# EAGLE board KickerBoard (EAGLE 6.4)
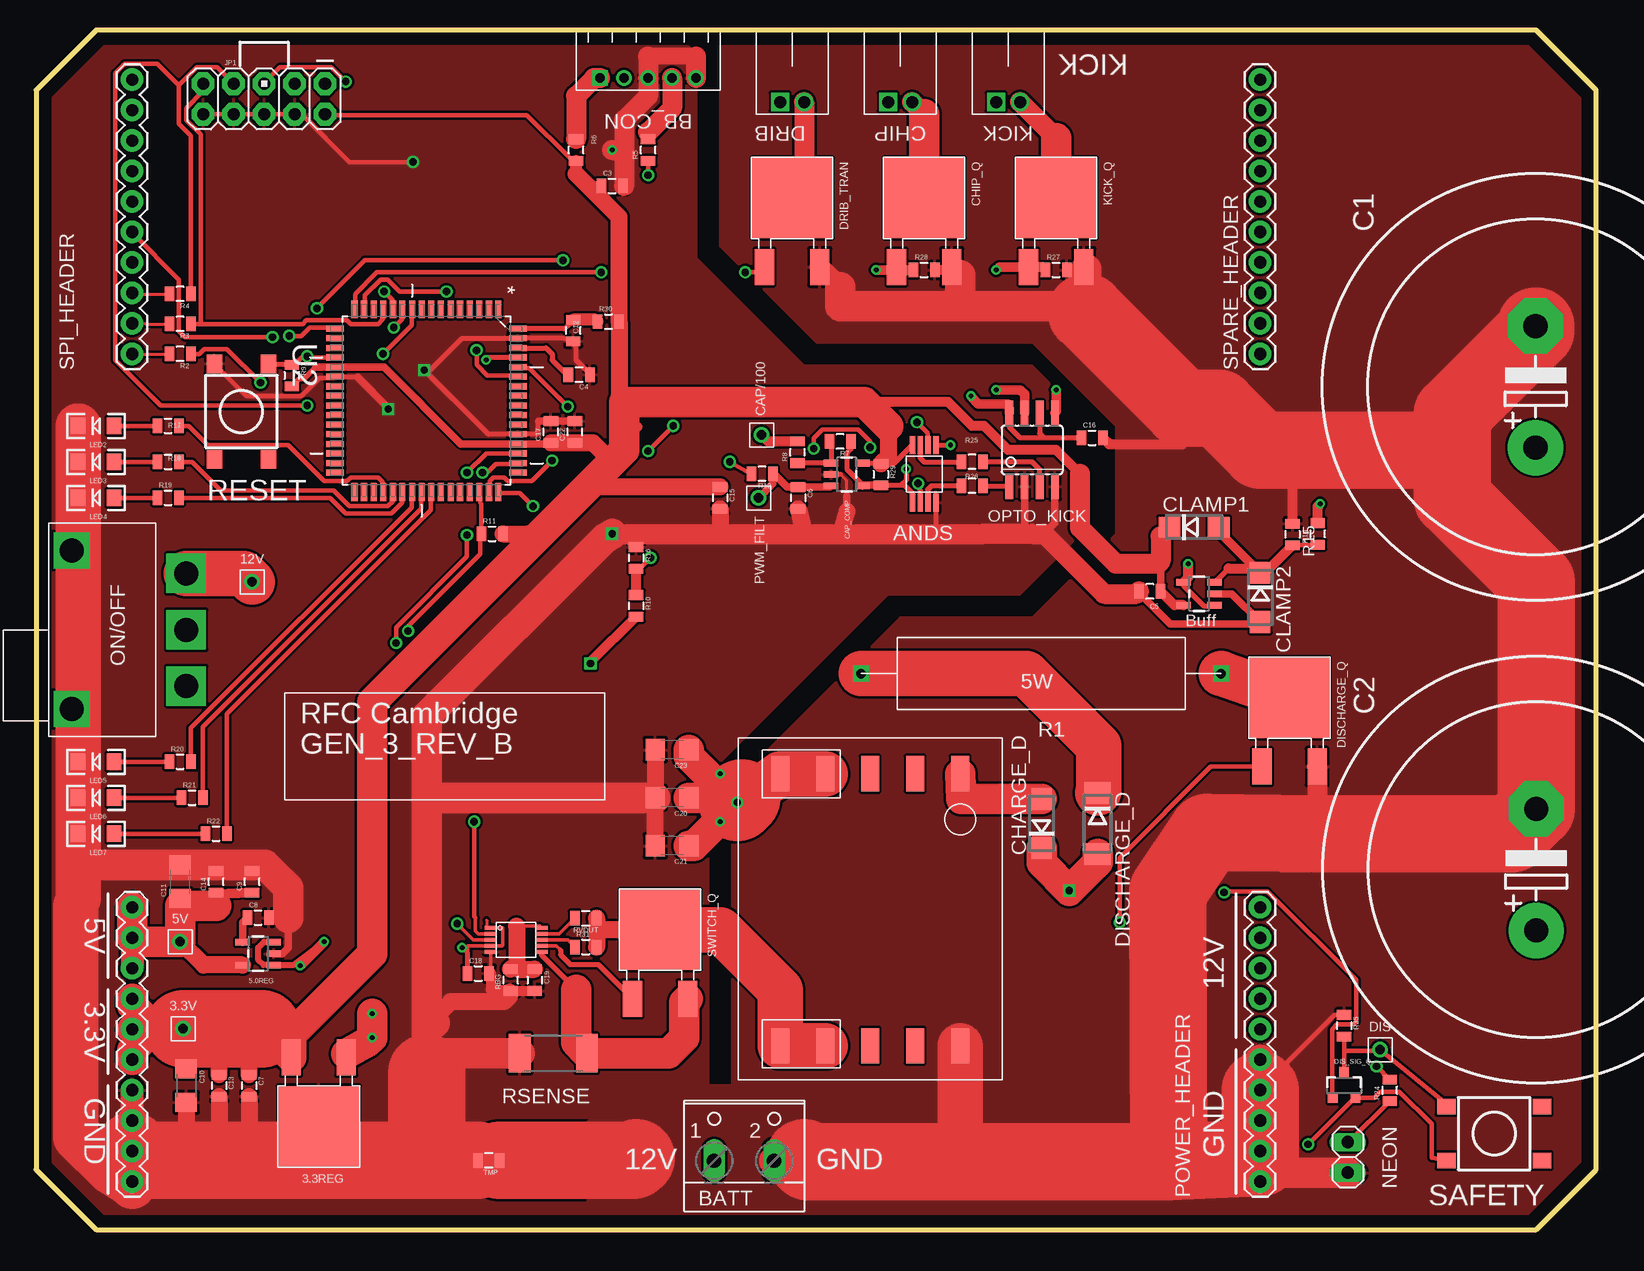
[diagram p0: board, top side]
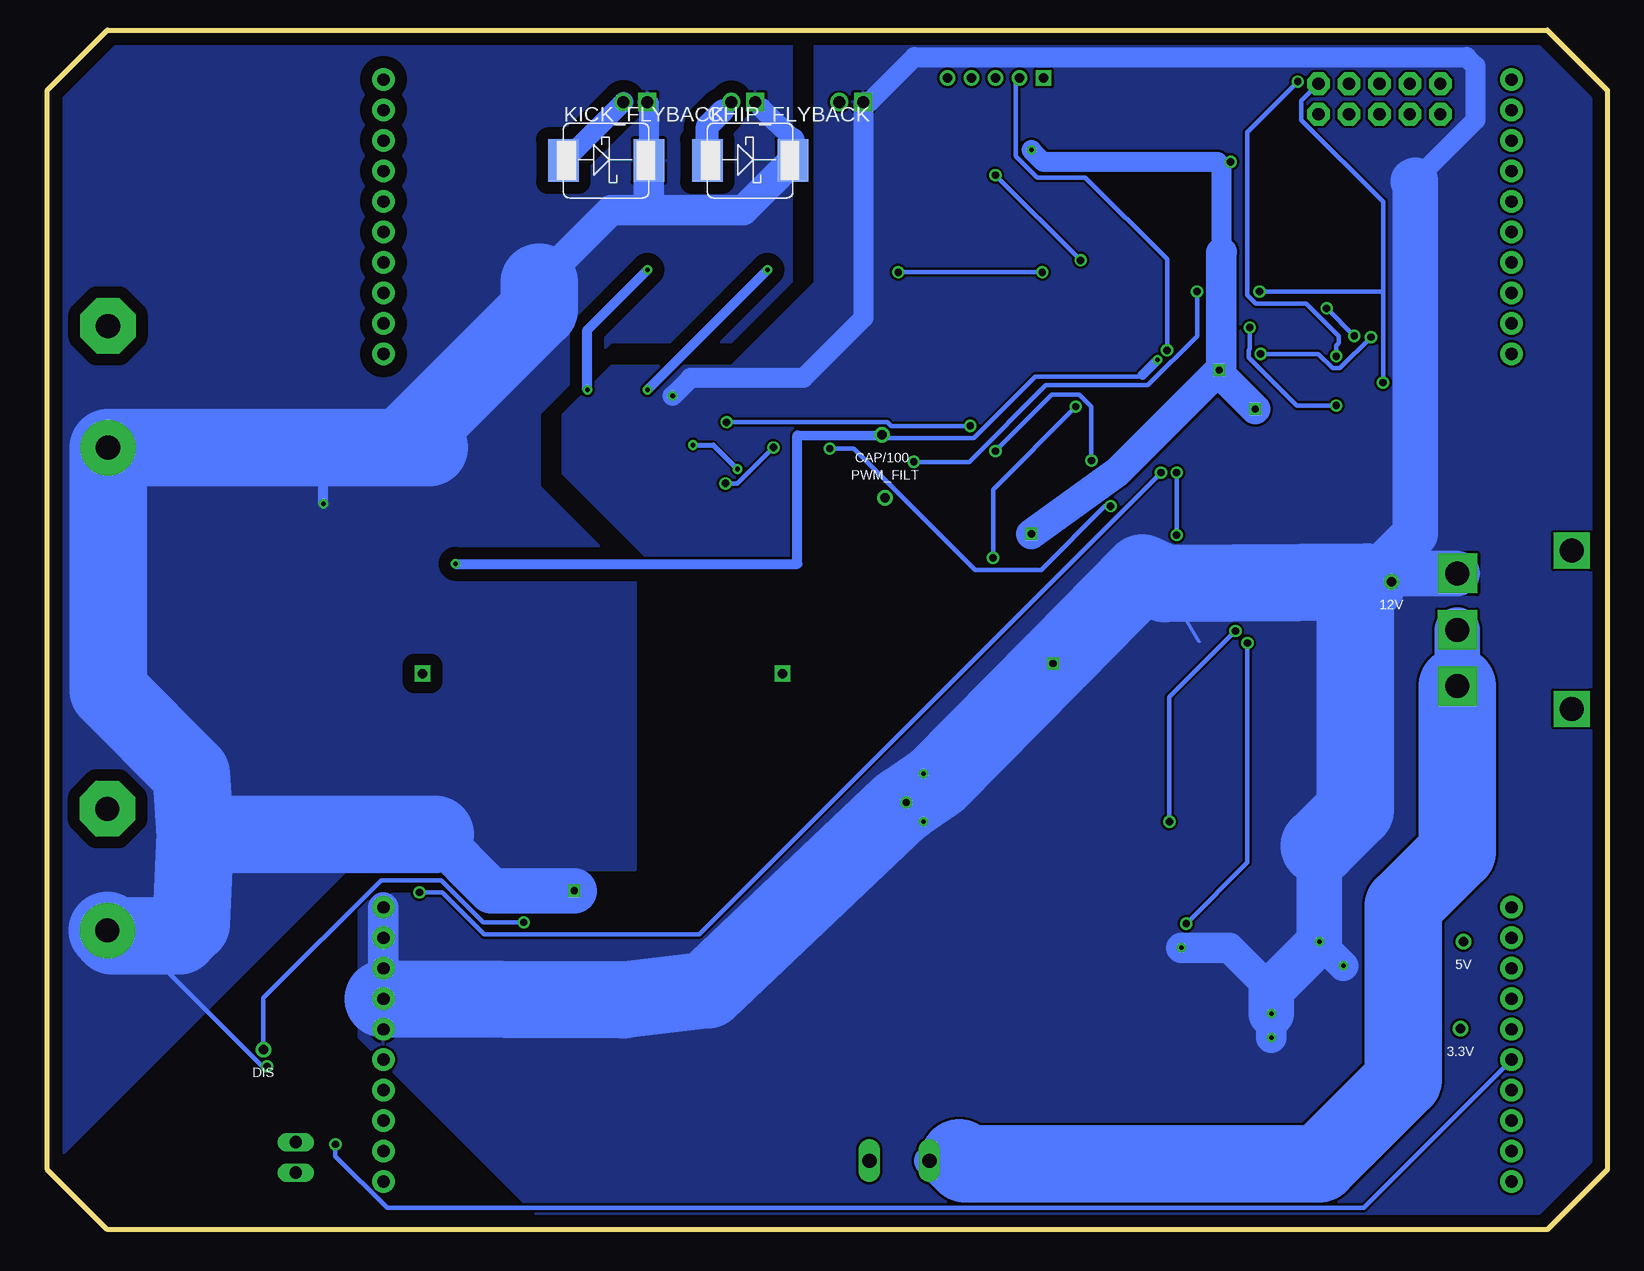
[diagram p1: board, bottom side, seen from below]

Size 130 x 100 mm. Coordinates in mm from the lower left corner, seen from the top.
Outline: 0,5 5,0 125,0 130,5 130,95 125,100 5,100 0,95 0,5
Copper layers (1*16): Top 0.035mm / dielectric 1.5mm / Bottom 0.035mm
Design rules "default *": minimum track width 15mil, minimum drill 24mil, track to track 8mil, track to pad 8mil, pad to pad 8mil, via to via 8mil, smd to smd 8mil, copper to edge 40mil, drill to drill 8mil, minimum pad ring 10mil, minimum via ring 8mil, stop-mask expansion 4mil, vias tented up to drill 0mil, thermal gap 10mil

## Footprints (pad centres in the part's own frame; a part is rotated, then mirrored left to right if it is on the bottom)
DPAK = smd 6.7 x 6.7: DRAIN 0,0 | smd 3 x 1.6: GATE 5.75,-2.3; SOURCE 5.75,2.3
TESTING_PT = drill 0.8: P$1 0,0
SOT23-5 = smd 0.55 x 1.2: 1 -0.95,-1.3; 2 0,-1.3; 3 0.95,-1.3; 4 0.95,1.3; 5 -0.95,1.3
TSSOP8 = smd 1.5 x 0.45: P$1 -2.4,0.975; P$2 -2.4,0.325; P$3 -2.4,-0.325; P$4 -2.4,-0.975; P$5 2.4,-0.975; P$6 2.4,-0.325; P$7 2.4,0.325; P$8 2.4,0.975
W237-102 = drill 1.194 long: 1 -2.5,-1.27; 2 2.5,-1.27
JST-5-2MM = drill 0.8 square: 1 4,0 | drill 0.8: 2 2,0; 3 0,0; 4 -2,0; 5 -4,0
EB35D = drill 2.007 pad 4.597: + -5.08,0 | drill 2.007 pad 4.597 octagon: - 5.08,0
0805 = smd 0.8 x 1.2: 1 -0.9,0; 2 0.9,0
1206 = smd 1.6 x 1.8: 1 -1.4,0; 2 1.4,0
DO214AC = smd 1.8 x 1.7: A 2.05,0; C -2.05,0
10-MSOP = smd 0.97 x 0.31: P$1 -0.485,-0.155; P$2 -0.485,-0.655; P$3 -0.485,-1.155; P$4 -0.485,-1.655; P$5 -0.485,-2.155; P$6 3.785,-2.155; P$7 3.785,-1.655; P$8 3.785,-1.155; P$9 3.785,-0.655; P$10 3.785,-0.155
JST-2-2MM = drill 1 square: 1 1,1 | drill 1: 2 -1,1
DO214AB = smd 2.54 x 3.556: ANODE 0,3.111; CATHODE 7.112,3.111
SOT23-3 = smd 0.8 x 0.9: 1 -0.95,-1; 2 0.95,-1; 3 0,1.1
DO214AA = smd 1.8 x 2.2: A 2.55,0; C -2.55,0
AVR_ICSP = drill 1.016 pad 1.88 octagon: 1 -1.27,5.08; 2 1.27,5.08; 3 -1.27,2.54; 4 1.27,2.54; 5 -1.27,0; 6 1.27,0; 7 -1.27,-2.54; 8 1.27,-2.54; 9 -1.27,-5.08; 10 1.27,-5.08
LED-1206 = smd 1.2 x 1.4: A -1.5,0; C 1.5,0
1X10 = drill 1.016 pad 1.88: 1 0,0; 2 2.54,0; 3 5.08,0; 4 7.62,0; 5 10.16,0; 6 12.7,0; 7 15.24,0; 8 17.78,0; 9 20.32,0; 10 22.86,0
TACTILE_SWITCH_TALL = smd 1.55 x 1.3: A1 -3.975,-2.25; A2 3.975,-2.25; B1 -3.975,2.25; B2 3.975,2.25
1X02 = drill 1.016 long: 1 -1.27,0; 2 1.27,0
CK_SWITCH = drill 2 pad 3.302 square: COM 0,0; IN1 4.699,0; IN2 -4.699,0 | drill 2 pad 2.54 square: SUP1 -6.604,-9.525; SUP2 6.604,-9.525
SOIC08 = smd 0.66 x 2.032: 1 -1.905,-3.073; 2 -0.635,-3.073; 3 0.635,-3.073; 4 1.905,-3.073; 5 1.905,3.073; 6 0.635,3.073; 7 -0.635,3.073; 8 -1.905,3.073
5WRESISTOR = drill 0.8 square: P$1 -15,0; P$2 15,0
R2512 = smd 1.8 x 3.2: 1 -2.8,0; 2 2.8,0
QFP80P1600X1600X120-64N = smd 1.473 x 0.508: 1 -7.62,5.994; 2 -7.62,5.207; 3 -7.62,4.394; 4 -7.62,3.607; 5 -7.62,2.794; 6 -7.62,2.007; 7 -7.62,1.194; 8 -7.62,0.406; 9 -7.62,-0.406; 10 -7.62,-1.194; 11 -7.62,-2.007; 12 -7.62,-2.794; 13 -7.62,-3.607; 14 -7.62,-4.394; 15 -7.62,-5.207; 16 -7.62,-5.994; 33 7.62,-5.994; 34 7.62,-5.207; 35 7.62,-4.394; 36 7.62,-3.607; 37 7.62,-2.794; 38 7.62,-2.007; 39 7.62,-1.194; 40 7.62,-0.406; 41 7.62,0.406; 42 7.62,1.194; 43 7.62,2.007; 44 7.62,2.794; 45 7.62,3.607; 46 7.62,4.394; 47 7.62,5.207; 48 7.62,5.994 | smd 0.508 x 1.473: 17 -5.994,-7.62; 18 -5.207,-7.62; 19 -4.394,-7.62; 20 -3.607,-7.62; 21 -2.794,-7.62; 22 -2.007,-7.62; 23 -1.194,-7.62; 24 -0.406,-7.62; 25 0.406,-7.62; 26 1.194,-7.62; 27 2.007,-7.62; 28 2.794,-7.62; 29 3.607,-7.62; 30 4.394,-7.62; 31 5.207,-7.62; 32 5.994,-7.62; 49 5.994,7.62; 50 5.207,7.62; 51 4.394,7.62; 52 3.607,7.62; 53 2.794,7.62; 54 2.007,7.62; 55 1.194,7.62; 56 0.406,7.62; 57 -0.406,7.62; 58 -1.194,7.62; 59 -2.007,7.62; 60 -2.794,7.62; 61 -3.607,7.62; 62 -4.394,7.62; 63 -5.207,7.62; 64 -5.994,7.62
10-TRANSFORMER = smd 2.92 x 1.52: P$1 0,0; P$2 0,-3.75; P$3 0,-7.5; P$4 0,-11.25; P$5 0,-15; P$6 22.67,-15; P$7 22.67,-11.25; P$8 22.67,-7.5; P$9 22.67,-3.75; P$10 22.67,0

## Placement (x,y rotation side)
3.3REG  3.3REG1AREG  [DPAK]  23.55,8.6 90 top
3.3V  TEST_PT  [TESTING_PT]  12.25,16.75 0 top
5.0REG  MIC5219 5V  [SOT23-5]  18.5,23 90 top
5V  TEST_PT  [TESTING_PT]  12,24 0 top
12V  TEST_PT  [TESTING_PT]  18,54 0 top
ANDS  AND-DUAL  [TSSOP8]  74,63 90 top
BATT  [W237-102]  59,7 0 top
BB_CON  JST-5  [JST-5-2MM]  51,96 180 top
C1  1500uF  [EB35D]  124.95,70.25 90 top
C2  1500uF  [EB35D]  125,30 90 top
C3  4.7uF  [0805]  48,87 0 top
C4  .1uF  [0805]  45.24,71.26 180 top
C5  .1uF  [0805]  92.8,53.2 180 top
C6  .1uF  [0805]  63.5,61 270 top
C7  .01uF  [0805]  17.75,12 270 top
C8  470pF  [0805]  18.5,26 0 top
C9  .01uF  [0805]  18,29 90 top
C10  47uF  [1206]  12.5,12 270 top
C11  47uF  [1206]  12,29 90 top
C12  .1uF  [0805]  44.76,74.95 90 top
C13  1uF  [0805]  15.25,12 270 top
C14  1uF  [0805]  15,29 90 top
C15  .1uF  [0805]  57,61 270 top
C16  .1uF  [0805]  88,66 0 top
C17  1uF  [0805]  42.9,66.5 90 top
C18  10uF  [0805]  36.85,21.35 0 top
C19  100pF  [0805]  41.55,20.8 270 top
C20  47uF  [1206]  53,36 180 top
C21  47uF  [1206]  53,32 180 top
C22  .01uF  [0805]  44.9,66.5 90 top
C23  47uF  [1206]  53,40 180 top
CAP/100  TEST_PT  [TESTING_PT]  60.45,66.25 0 top
CAP_COMP  LM331  [SOT23-5]  67.55,62.95 270 top
CAP_SENSE_BUF  MCP6291T-E/OT  [SOT23-5]  96.9,53 90 top
CHARGE_D  1kV, ultrafast  [DO214AC]  83.8,33.85 90 top
CHARGE_U  LT3750  [10-MSOP]  38.35,25.3 0 top
CHIP  JST-22MM  [JST-2-2MM]  72,95 180 top
CHIP_FLYBACK  DIODE-ZENERDO214AB  [DO214AB]  75,86 0 bottom
CHIP_Q  [DPAK]  74,86 270 top
CLAMP1  DIODE-ZENERDO214AC  [DO214AC]  96.5,58.55 0 top
CLAMP2  DIODE-ZENERDO214AC  [DO214AC]  102,52.7 270 top
DIS  TEST_PT  [TESTING_PT]  112,15 0 top
DIS_SIG_Q  MOSFET-PCHANNEL  [SOT23-3]  109,12 0 top
DISCHARGE_D  [DO214AA]  88.45,33.85 270 top
DISCHARGE_Q  [DPAK]  104.45,44.35 270 top
DRIB  JST-22MM  [JST-2-2MM]  63,95 180 top
DRIB_TRAN  [DPAK]  63,86 270 top
FRAME1  FRAME-LETTER  [CREATIVE_COMMONS]  -77.47,76.2 0 top  (outside the outline)
FRAME2  FRAME-LETTER  [CREATIVE_COMMONS]  -77.47,85.09 0 top  (outside the outline)
FRAME3  FRAME-LETTER  [CREATIVE_COMMONS]  -77.47,93.98 0 top  (outside the outline)
FRAME4  FRAME-LETTER  [CREATIVE_COMMONS]  -75.47,65.87 0 top  (outside the outline)
GEN_3_REV_B  Spring 2015  [LOGO]  22,37.1 0 top
JP1  M05X2PTH  [AVR_ICSP]  19,94.25 270 top
KICK  JST-22MM  [JST-2-2MM]  81,95 180 top
KICK_FLYBACK  DIODE-ZENERDO214AB  [DO214AB]  87,86 0 bottom
KICK_Q  [DPAK]  85,86 270 top
LED2  [LED-1206]  5,67 180 top
LED3  [LED-1206]  5,64 180 top
LED4  [LED-1206]  5,61 180 top
LED5  [LED-1206]  5,39 180 top
LED6  [LED-1206]  5,36 180 top
LED7  [LED-1206]  5,33 180 top
LOGIC_HEADER  M10SILK_FEMALE_PTH  [1X10]  8,4 90 top
MAN-DIS  SWITCH-MOMENTARY-2SMD-4  [TACTILE_SWITCH_TALL]  121.5,8 180 top
NEON  [1X02]  109.31,6.02 270 top
ON/OFF  SPDT-SWITCH  [CK_SWITCH]  12.5,50 270 top
OPTO_KICK  ILD205  [SOIC08]  83,65 0 top
POWER_HEADER  M10SILK_FEMALE_PTH  [1X10]  102,4 90 top
PWM_FILT  TEST_PT  [TESTING_PT]  60.2,61 180 top
R1  2k,5w  [5WRESISTOR]  83.75,46.35 180 top
R2  4.7k  [0805]  12,73 180 top
R3  4.7k  [0805]  12,75.5 180 top
R4  4.7k  [0805]  12,78 180 top
R5  20  [0805]  51,90 90 top
R6  100  [0805]  45,90 90 top
R7  100k  [0805]  67,65.7 180 top
R8  3k  [0805]  63.45,64.8 90 top
R9  10k  [0805]  21.3,71.2 270 top
R10  80k  [0805]  50,52 270 top
R11  100k  [0805]  38,58 0 top
R12  100k  [0805]  60.5,63 180 top
R14  1M  [0805]  106.8,58 90 top
R15  10K  [0805]  104.7,57.95 270 top
R16  20k  [0805]  50,56 270 top
R17  1k  [0805]  11,67 0 top
R18  1k  [0805]  11,64 0 top
R19  1k  [0805]  11,61 0 top
R20  1k  [0805]  12,39 0 top
R21  1k  [0805]  13,36 0 top
R22  1k  [0805]  15,33 0 top
R24  536k  [0805]  112.8,11.6 90 top
R25  100  [0805]  78,64 180 top
R26  100  [0805]  78,62 180 top
R27  1k  [0805]  85,80 0 top
R28  1k  [0805]  74,80 0 top
R29  10k  [0805]  70.4,62.95 270 top
R30  10k  [0805]  47.69,75.69 0 top
R31  43k  [0805]  45.8,23.55 0 top
R35  10k  [0805]  109,17 270 top
RBG  2.49k  [0805]  39.55,20.8 90 top
RSENSE  10m  [R2512]  43.1,14.7 0 top
RVOUT  50.4k  [0805]  45.8,25.95 0 top
S1  SWITCH-MOMENTARY-2SMD-4  [TACTILE_SWITCH_TALL]  17.1,68.2 90 top
SPARE_HEADER  M10SILK_FEMALE_PTH  [1X10]  102,73 90 top
SPI_HEADER  M10SILK_FEMALE_PTH  [1X10]  8,73 90 top
SWITCH_Q  [DPAK]  52,25 270 top
TMP  0  [0805]  37.72,5.76 180 top
U2  ATMEGA165PV-8AU  [QFP80P1600X1600X120-64N]  32.53,69.1 270 top
U$1  32052-TRANSFORMER  [10-TRANSFORMER]  77,38 270 top

## Library data of the parts
3.3REG 3.3V 5V 12V ANDS BB_CON CAP/100 CAP_COMP CHARGE_D CHIP CHIP_FLYBACK CHIP_Q CLAMP1 CLAMP2 DIS DISCHARGE_D DISCHARGE_Q DRIB DRIB_TRAN GEN_3_REV_B KICK KICK_FLYBACK KICK_Q ON/OFF PWM_FILT R1 SWITCH_Q U$1 = gen3
5.0REG = SparkFun-PowerIC; PROD_ID: VREG-10107
BATT = con-wago-500; MPN: 237-102; OC_FARNELL: unknown; OC_NEWARK: 70K9898
C1 C2 = rcl
C3-C23 = SparkFun-Capacitors
CAP_SENSE_BUF = SparkFun-AnalogIC; PROD_ID: IC-11991
CHARGE_U = kickerchips
DIS_SIG_Q = SparkFun-DiscreteSemi; PROD_ID: TRANS-08285
FRAME1-FRAME4 = SparkFun-Aesthetics
JP1 = SparkFun-Connectors
LED2-LED7 = SparkFun-LED
LOGIC_HEADER POWER_HEADER SPARE_HEADER SPI_HEADER = SparkFun-Connectors; PROD_ID: CONN-11563
MAN-DIS S1 = SparkFun-Electromechanical; PROD_ID: SWCH-11966
NEON = pinhead
OPTO_KICK = optocoupler; MF: VISHAY/TELEFUNKEN; MPN: ILD205T; OC_FARNELL: 1469512; OC_NEWARK: 20H8678
R2-R12 R16-R22 R24-R31 R35 RBG RSENSE RVOUT TMP = SparkFun-Passives
R14 R15 = SparkFun-Resistors
U2 = Atmel_By_element14_Batch_1-00; MPN: ATMEGA165PV-8AU; OC_FARNELL: 1455104; OC_NEWARK: 58M3730; PACKAGE: TQFP-64; SUPPLIER: Atmel

## Nets
3.3V: 3.3REG.SOURCE 3.3V.P$1 ANDS.P$8 C3.1 C5.1 C7.1 C10.1 C13.1 C15.1 C17.1 C22.1 CAP_COMP.5 CAP_SENSE_BUF.5 CLAMP1.C DIS_SIG_Q.2 JP1.2 LOGIC_HEADER.5 LOGIC_HEADER.6 LOGIC_HEADER.7 MAN-DIS.B2 R6.1 R9.2 R11.2 R29.1 R30.2 U2.21 U2.52
5V: 5.0REG.5 5V.P$1 C9.1 C11.1 C14.1 LOGIC_HEADER.8 LOGIC_HEADER.9 LOGIC_HEADER.10
12V: 3.3REG.GATE 5.0REG.1 5.0REG.3 12V.P$1 C16.1 C18.1 C20.1 C21.1 C23.1 CHARGE_U.P$1 CHARGE_U.P$4 DRIB.1 ON/OFF.IN2 OPTO_KICK.6 OPTO_KICK.8 POWER_HEADER.6 POWER_HEADER.7 POWER_HEADER.8 POWER_HEADER.9 POWER_HEADER.10 R10.2 U$1.P$4 U$1.P$5
12VGND: BATT.2 C1.- C2.- C16.2 CHIP_Q.SOURCE DISCHARGE_Q.SOURCE DRIB_TRAN.SOURCE KICK_Q.SOURCE NEON.2 POWER_HEADER.1 POWER_HEADER.2 POWER_HEADER.3 POWER_HEADER.4 POWER_HEADER.5 R15.1 R27.2 R28.2 R35.1 TMP.1 U$1.P$10
AND_CHIP: ANDS.P$3 R26.2
AND_KICK: ANDS.P$7 R25.2
AREF: C4.2 U2.62
AVCC: C12.2 R30.1 U2.64
BAT+: BATT.1 ON/OFF.COM ON/OFF.IN1
BATSENSE: R10.1 R16.2 U2.60
BB_IN: BB_CON.2 U2.59
BB_OUT: R5.1 U2.17
CAP+: C1.+ C2.+ CHARGE_D.C CHIP.1 CHIP_FLYBACK.CATHODE DISCHARGE_D.A KICK.1 KICK_FLYBACK.CATHODE R14.2 R24.2
CHARGE: CHARGE_U.P$3 U2.51
CHIP_ENABLE: ANDS.P$6 U2.47
COMP_OUT: ANDS.P$1 ANDS.P$5 CAP_COMP.4 R7.1 R29.2
DISCHARGE_GATE: DIS.P$1 DIS_SIG_Q.3 DISCHARGE_Q.GATE MAN-DIS.A2 R35.2
DIVCAP: CAP/100.P$1 CAP_SENSE_BUF.1 CAP_SENSE_BUF.4 R8.2 U2.61
DONE: CHARGE_U.P$2 R11.1 U2.46
DRIB: DRIB_TRAN.GATE U2.16
GATE_CHIP: CHIP_Q.GATE OPTO_KICK.7 R28.1
GATE_KICK: KICK_Q.GATE OPTO_KICK.5 R27.1
GLED2: R18.2 U2.37
GLED3: R20.2 U2.39
GLED4: R22.2 U2.41
GND: 3.3REG.DRAIN 5.0REG.2 ANDS.P$4 BB_CON.3 BB_CON.5 C3.2 C4.1 C5.2 C6.2 C7.2 C8.2 C9.2 C10.2 C11.2 C12.1 C13.2 C14.2 C15.2 C17.2 C18.2 C19.2 C20.2 C21.2 C22.2 C23.2 CAP_COMP.2 CAP_SENSE_BUF.2 CHARGE_U.P$5 CLAMP2.A JP1.4 JP1.6 JP1.8 JP1.10 LED2.C LED3.C LED4.C LED5.C LED6.C LED7.C LOGIC_HEADER.1 LOGIC_HEADER.2 LOGIC_HEADER.3 LOGIC_HEADER.4 OPTO_KICK.2 OPTO_KICK.4 R16.1 RBG.1 RSENSE.1 S1.B2 TMP.2 U2.22 U2.53 U2.63
HYSTERESIS: CAP_COMP.1 R7.2 R8.1
KICK_ENABLE: ANDS.P$2 U2.48
MISO: JP1.9 R3.1 U2.13
MOSI: JP1.1 R2.1 U2.12
N$1: C6.1 CAP_COMP.3 PWM_FILT.P$1 R12.1
N$2: LED2.A R17.1
N$3: R3.2 SPI_HEADER.2
N$4: R4.2 SPI_HEADER.3
N$5: R31.2 RVOUT.2 SWITCH_Q.DRAIN U$1.P$6 U$1.P$7
N$6: C19.1 CHARGE_U.P$10 RBG.2
N$7: CHARGE_U.P$9 RVOUT.1
N$9: CHARGE_U.P$7 SWITCH_Q.GATE
N$10: CHARGE_U.P$8 R31.1
N$12: R2.2 SPI_HEADER.1
N$13: DISCHARGE_D.C R1.P$2
N$16: 5.0REG.4 C8.1
N$17: DISCHARGE_Q.DRAIN R1.P$1
N$20: OPTO_KICK.3 R25.1
N$21: LED3.A R18.1
N$22: LED4.A R19.1
N$24: CHARGE_U.P$6 RSENSE.2 SWITCH_Q.SOURCE
N$25: LED5.A R20.1
N$26: LED6.A R21.1
N$31: LED7.A R22.1
N$32: BB_CON.4 R5.2
N$33: KICK.2 KICK_FLYBACK.ANODE KICK_Q.DRAIN
N$34: CHIP.2 CHIP_FLYBACK.ANODE CHIP_Q.DRAIN
N$36: OPTO_KICK.1 R26.1
N$40: BB_CON.1 R6.2
PWM: R12.2 U2.15
RESET: JP1.5 R9.1 S1.A2 U2.20
RLED1: R17.2 U2.36
RLED2: R19.2 U2.38
RLED3: R21.2 U2.40
SCK: JP1.7 R4.1 U2.11
SS_E1: SPI_HEADER.6
SS_E2: SPI_HEADER.7
SS_E3: SPI_HEADER.8
SS_K: SPI_HEADER.5 U2.10
SS_M: SPI_HEADER.4
TO_DRIB: DRIB.2 DRIB_TRAN.DRAIN
TO_NEON: NEON.1 R24.1
TRANS_OUT: CHARGE_D.A U$1.P$1
UNBUF_DIVCAP: CAP_SENSE_BUF.3 CLAMP1.A CLAMP2.C R14.1 R15.2
~DIS: DIS_SIG_Q.1 U2.50

## Tracks (layer width: path | path; a pad name or v marks a point on that pad's centre or on a via)
3.3V  (via drill 0.61)
  Top 0.254: 68.75,63.95 CAP_COMP.5
  Top 0.381: MAN-DIS.B2 117.5,5.8 116.3,6 116.3,8.8 113.6,11.5 112,11.5 111.5,11 DIS_SIG_Q.2 109.8,10.9 v106,7.1 | JP1.2 24.1,92.9 40.9,92.9 44.5,89.3 R6.1
  Top 0.4: ANDS.P$8 71.47,63.85 R29.1 68.9,63.85 CAP_COMP.5
  Top 0.406: 23.29,71.89 22.3,70.9 21.9,70.9 R9.2
  Top 0.61: 23.29,71.89 U2.21 29.01,71.89 35.4,65.5 U2.52 42.79,65.49 C17.1 | C5.1 93.7,57.8 CLAMP1.C
  Top 0.8: C3.1 46,87
  Top 0.813: CAP_SENSE_BUF.5 94.85,52.05 C5.1 | 50.1,66.9 50,67 49,67 | 87,63 85,65 81,65 79,67 78,67 76,69 69,69 | 71.4,67.7 70.95,67.25 70.75,67.25
  Top 1.016: 45,88 R6.1
  Top 1.422: C17.1 C22.1 46.4,65.6 48,64 | C13.1 15.25,16.75 | C7.1 17.75,16.75 | C10.1 12.5,16.5 3.3V.P$1 | 71,67 71,64.45 R29.1 | 45,88 46,87 48.59,84.41 R30.2 48.59,69.41 49,69 | R11.2 41,58 41.5,57.5 | C15.1 47.1,61.9 46.5,62.5
  Top 1.676: 93.7,57.8 93.7,55.7 93.5,55.5 90,55.5 87,58.5 87,63
  Top 2.54: LOGIC_HEADER.6 9.75,16.7 | 9.75,16.7 10,16.7 | 10,16.7 12.2,16.7 3.3V.P$1 | 18.85,16.75 3.3REG.SOURCE 21.25,16.25 28,23 28,44 41.5,57.5 46.5,62.5 48,64 49,65 49,67 49,69 69,69 70.75,67.25 71,67 | LOGIC_HEADER.7 8,18.7 10,16.7 | LOGIC_HEADER.5 8,14.95 9.75,16.7
  Top 6.452: 3.3V.P$1 15.25,16.75 17.75,16.75 18.85,16.75
  Bottom 0.381: v106,7.1 106,6.1 101.7,1.8 20.3,1.8 8,14.1 LOGIC_HEADER.5
5V
  Top 0.254: 8.1,21.8 LOGIC_HEADER.8
  Top 0.381: C11.1 12,27
  Top 0.813: 15,27 14.9,28 | 14.9,28 C9.1 | 15,27 14,27.1 14.9,28 | 14.9,28 C14.1 | 14.05,26.95 15,27
  Top 1.422: 5.0REG.5 13.95,22.05 5V.P$1
  Top 1.93: LOGIC_HEADER.9 LOGIC_HEADER.8
  Top 2.54: LOGIC_HEADER.10 LOGIC_HEADER.9 8.32,24 5V.P$1 12,27 15,27
12V  (via drill 0.4, 0.6)
  Top 0.254: 37.55,25.8 37.55,25.2
  Top 0.305: 37.55,25.2 37.6,25.14 CHARGE_U.P$1 38.9,25.14 38.9,25.15 38.9,23.7 38.85,23.65 CHARGE_U.P$4 35.95,23.65 C18.1
  Top 0.381: v57,38 58.82,36
  Top 0.406: C16.1 84,66 | 84,66 82,66 81.09,66.91 OPTO_KICK.8 | OPTO_KICK.6 83.64,66.36 84,66 | C18.1 35.95,23.05 v35.5,23.5
  Top 0.5: 5.0REG.3 19.75,24 19,24 18.5,23.5 18.5,22.5 18.95,22.05 5.0REG.1 21.45,22.05 v24,24
  Top 0.8: OPTO_KICK.8 81.09,68.41 81,68.8 78.5,68.8 v77.9,69.5
  Top 0.813: v24,24 v22,22 | R10.2 46.2,47.3 v46.2,47.19
  Top 1.422: 25.85,14.65 3.3REG.GATE
  Top 2.54: C23.1 54.4,39.48 57.95,35.93 58,35.93 | 58,35.93 58.93,35.93 59,36 | C20.1 57.93,36 57.97,35.97 | 57.97,35.97 58,35.93 | C21.1 54.82,32 v58.42,35.6 | v57,34 57,35 57.97,35.97 | v28,18 v28,16 27.65,15.65 25.85,14.65
  Top 3.81: 12V.P$1 17.3,54.7 ON/OFF.IN2 | U$1.P$4 U$1.P$5 59,36 58.82,36
  Top 6.452: 58.82,36 v58.42,35.6
  Bottom 0.254: 34,49 36.91,53.87 | 82,17.8 81.99,19.15
  Bottom 0.61: 55.81,37.43 55.56,37.43 54.99,38
  Bottom 0.813: v46.2,47.19 45.7,47.69 45.7,47.7
  Bottom 1.676: 16,87.5 11,92.5 11,97 11.75,97.75 57.75,97.75 61.5,94 DRIB.1 62,76 67,71 76.4,71 v77.9,69.5
  Bottom 1.93: POWER_HEADER.7 POWER_HEADER.6
  Bottom 2.54: POWER_HEADER.10 POWER_HEADER.9 POWER_HEADER.8 POWER_HEADER.7 | v22,22 v24,24 | v28,16 v28,18 | v35.5,23.5 31.5,23.5 28,20
  Bottom 3.81: ON/OFF.IN2 19.3,54.7 | 21,53.7 19.3,54.7 | 19.3,54.7 20,54 | 16.2,87.4 16,87.5 16,58 19.3,54.7 | v58.42,35.6 57.73,35.6 56.14,37.2 | 24,32 v24,24 28,20 v28,18
  Bottom 6.45: 24,32 21,35 21,53.7
  Bottom 6.452: 20,54 36.91,53.87 38.77,54.74 45.7,47.7 v46.2,47.19 55.81,37.43 56.14,37.2 v58.42,35.6 59,35.2 75,20 81.99,19.15 POWER_HEADER.7
  pour Bottom: 6,99 1,94 1,6 6,1 89,1 104,16 104,28 78,28 78,54 87,63 87,68 83,72 73,72 66,79 66,99
12VGND
  Top 0.254: 125.8,78.1 125.38,76.73 C1.-
  Top 0.381: R35.1 108.2,17.9 104.2,13.9 POWER_HEADER.4
  Top 0.406: 125.9,77.25 125.38,76.73
  Top 0.813: 98.53,68.47 95.53,65.47 89.42,65.47 C16.2 | CHIP_Q.SOURCE 76.05,80 R28.2 | 86,80 R27.2 87.05,80 KICK_Q.SOURCE | R15.1 104.7,64.8 104.5,65
  Top 1.676: DISCHARGE_Q.SOURCE 106.75,33.05 106.7,33 | KICK_Q.SOURCE 87.5,80.05 | CHIP_Q.SOURCE 77,79.55 | DRIB_TRAN.SOURCE 67,78.55
  Top 2.54: POWER_HEADER.2 POWER_HEADER.1 102,4.75 NEON.2 | POWER_HEADER.4 POWER_HEADER.5 | 87.5,80.05 87.5,77 | 87.5,77 87.5,76.5 | 77,79.55 77,77 | 67,78.55 67,77 77,77 | 77,77 87.5,77 | 64,6 61.77,6 BATT.2
  Top 3.81: U$1.P$10 77,5.65
  Top 6.452: C1.- 124.95,74.95 118,68 118,65 | 118,65 118,61 125,54 C2.- 122.92,33 106.7,33 97.6,33.1 94.3,28.2 | 118,65 104.5,65 102,65 98.53,68.47 95.53,68.47 87.5,76.5 | 94.4,5.65 102,6 POWER_HEADER.2 POWER_HEADER.3 POWER_HEADER.4 | 94.3,28.2 94.4,5.65 | 94.3,28.2 94.5,28.25 | 94.4,5.65 77,5.65 64.35,5.65 64,6 | TMP.1 49.76,5.76 50,6
  pour Top: 49,12 46,9 46,2 47,1 68,1 69,2 69,9 66,12
  pour Top: 57,99 57,82 65,74 83,74 90,67 90,58 83,51 72,51 58,37 58,1 124,1 129,6 129,94 124,99
AND_CHIP
  Top 0.4: R26.2 74.6,62 74.3,61.7 74.3,60.62 ANDS.P$3
AND_KICK
  Top 0.4: ANDS.P$7 73.67,64.33 74,64 R25.2
AREF
  Top 0.254: 44,71.5 C4.2 | 40.5,73.5 U2.62
  Top 0.406: 44,71.5 43,72.5 43,73 42.5,73.5 40.5,73.5
AVCC
  Top 0.254: 40.5,75.1 U2.64 | 44.5,75.5 C12.2
  Top 0.406: 40.5,75.1 44,75.1 44.5,75.5
  Top 1.016: R30.1 46.63,75.85 C12.2
BAT+
  Bottom 2.54: 54,6 56.23,6 BATT.1
  Bottom 3.81: ON/OFF.COM ON/OFF.IN1
  Bottom 6.452: ON/OFF.IN1 12.5,31.5 17,27 17,12.5 24,5.5 53.5,5.5 54,6
BATSENSE  (via drill 0.61)
  Top 0.381: v44.3,68.6 41.1,71.8 40.2,71.8 U2.60 | v51.2,56 50.4,55.2 R16.2
  Top 0.813: R10.1 R16.2
  Bottom 0.381: v51.2,56 51.2,61.7 v44.3,68.6
BB_IN  (via drill 0.61)
  Top 0.381: v36.7,73.3 36.7,72.1 37.6,71.2 40.1,71.2 U2.59
  Bottom 0.381: v36.7,73.3 36.7,80.9 43.5,87.7 47.5,87.7 49.3,89.5 49.3,95.7 BB_CON.2
BB_OUT  (via drill 0.61)
  Top 0.381: v51,87.9 R5.1 | v43.9,80.8 27.4,80.8 v23.4,76.8 | v21.1,74.5 22.1,74.5 22.8,75.2 24.8,75.2 U2.17
  Bottom 0.381: v43.9,80.8 v51,87.9 | v21.1,74.5 v23.4,76.8
CAP+  (via drill 0.4, 0.6, 0.61)
  Top 0.381: v111.7,13.6 R24.2
  Top 0.813: 106.85,58.9 R14.2 106.8,60.3 v107,60.5
  Top 2.54: DISCHARGE_D.A 88.45,30.6 v86.1,28.25 83.8,30.55 CHARGE_D.C
  Bottom 0.381: v111.7,13.6 112.1,13.6 119.8,21.3 119.8,24.5
  Bottom 0.406: 120.7,65.57 120.3,65.17
  Bottom 0.813: 96.75,63.3 97.5,63.3 97.5,64.47 98.2,65.17 | v107,60.5 107,65.17
  Bottom 1.016: CHIP.1 70.5,93.5
  Bottom 1.676: KICK.1 79.89,93.89 KICK_FLYBACK.CATHODE | 70.5,93.5 67.89,90.89
  Bottom 1.93: 67.89,90.89 CHIP_FLYBACK.CATHODE
  Bottom 2.54: KICK_FLYBACK.CATHODE 79.89,85.11 80,85 | 80,85 72,85 CHIP_FLYBACK.CATHODE | 80,85 83,85 89,79
  Bottom 3.81: v86.1,28.25 93,28.25 97.7,32.95
  Bottom 6.452: 100.5,65.17 107,65.17 120.3,65.17 C1.+ 124.95,44.95 118,38 117.7,32.95 | 100.5,65.17 98.2,65.17 | 117.7,32.95 118,25.5 119,24.5 119.8,24.5 124.58,24.5 C2.+ | 97.7,32.95 117.7,32.95 | 89,79 89,76.67 100.5,65.17
  pour Bottom (isolate 1): 68,99 68,79 73,74 83,74 89,68 89,62 81,54 81,30 105,30 129,6 129,94 124,99
CHARGE  (via drill 0.61)
  Top 0.305: CHARGE_U.P$3 36.44,24.15 35.4,25.19 35.4,25.2
  Top 0.381: v35.9,63.1 37.5,64.7 40.1,64.7 U2.51 | v35.9,57.9 35.9,56.1 30,50.2 v30,48.9 | 35.4,25.2 v35.1,25.5
  Bottom 0.381: v35.9,57.9 v35.9,63.1 | v30,48.9 30,30.6 v35.1,25.5
CHIP_ENABLE  (via drill 0.61)
  Top 0.381: v43,64.1 41.3,62.4 39.3,62.4 39,62.7 38.1,62.7 37.8,62.4 37.8,61.5 U2.47 | v53.1,67 v51,64.9 | v73.4,67.3 74.3,66.4 74.3,65.4 ANDS.P$6
  Bottom 0.381: v43,64.1 43,68.6 44,69.6 46.3,69.6 v51,64.9 | v53.1,67 59.7,67 60,67.3 v73.4,67.3
COMP_OUT  (via drill 0.4)
  Top 0.4: R29.2 72.1,62.05 | 72.1,62.05 72.35,62.05 73,61.4 73,60.62 ANDS.P$1 | ANDS.P$5 v76.2,65.4 | v72.5,63.4 72.5,62.45 72.1,62.05
  Top 0.406: 68.9,62.05 67.6,63.35 67.6,64.75 67.9,65.05 R7.1
  Top 0.61: CAP_COMP.4 68.9,62.05 R29.2
  Bottom 0.4: v76.2,65.4 74.5,65.4 v72.5,63.4
DISCHARGE_GATE  (via drill 0.61)
  Top 0.381: R35.2 109,14.9 | 109,14.9 DIS_SIG_Q.3 | MAN-DIS.A2 117.5,10.3 117.5,10.5 DIS.P$1 111.9,14.9 109,14.9 | DISCHARGE_Q.GATE 97.9,38.6 90.3,31 v90.3,25.6
  Bottom 0.381: v90.3,25.6 93.7,25.6 97.2,29.1 102.2,29.1 112,19.3 DIS.P$1
DIVCAP  (via drill 0.4)
  Top 0.406: CAP_SENSE_BUF.4 95.6,53.7 97.3,52 98.15,52 CAP_SENSE_BUF.1 | U2.61 37.71,72.71 v37.5,72.5
  Top 0.813: CAP_SENSE_BUF.4 96,54.35 v96,55.5 | R8.2 61,65.7 CAP/100.P$1
  Bottom 0.381: 38.75,71.25 39.1,71.1 47.7,71.1 52.8,66 60.2,66 CAP/100.P$1
  Bottom 0.813: v96,55.5 67.5,55.5 67.5,66.2 CAP/100.P$1 | 38.75,71.25 v37.5,72.5
DONE  (via drill 0.61)
  Top 0.305: 36.95,24.64 CHARGE_U.P$2 36.86,24.65 36.6,24.91 36.6,26
  Top 0.381: U2.46 37,61.4 37,60.6 37.1,60.5 R11.1 37,57.9 37,56.3 31,50.3 v31,49.9 | v36.5,34 36.5,26.1 36.6,26
  Bottom 0.381: v36.5,34 36.5,44.4 v31,49.9
DRIB  (via drill 0.61)
  Top 0.381: v47.1,79.8 28.4,79.8 26.6,78 26.6,76.8 U2.16 | v59.1,79.8 60.3,79.8 60.7,80.2 DRIB_TRAN.GATE
  Bottom 0.381: v59.1,79.8 v47.1,79.8
GATE_CHIP  (via drill 0.4)
  Top 0.8: OPTO_KICK.7 82.36,69.64 82,70 v80,70 | v70,80 71.45,80 CHIP_Q.GATE
  Top 0.813: CHIP_Q.GATE 71.95,80 R28.1
  Bottom 0.813: v80,70 v70,80
GATE_KICK  (via drill 0.4)
  Top 0.8: KICK_Q.GATE 80.25,80.25 v80,80 | v85,70 85,68.17 OPTO_KICK.5
  Top 0.813: R27.1 83.85,80.25 KICK_Q.GATE
  Bottom 0.813: v85,70 85,75 v80,80
GLED2
  Top 0.381: R18.2 13,64 15.4,61.6 24.8,61.6 26.1,60.3 29.3,60.3 29.7,60.7 29.7,61.4 U2.37
GLED3
  Top 0.381: R20.2 12.9,41.8 31.3,60.2 31.3,61.4 U2.39
GLED4
  Top 0.381: R22.2 15.9,43 32.9,60 32.9,61.4 U2.41
GND  (via drill 0.4, 0.6, 0.61)
  Top 0.254: 63.5,60 C6.2 | 67.05,62.95 67.55,62.45 67.55,61.15 | 45,74 C12.1 44.5,74 | 46,71.5 C4.1 | 40.5,74.3 U2.63 | 82.4,61.9 OPTO_KICK.2
  Top 0.305: C18.2 37.87,21.46 CHARGE_U.P$5 | C6.2
  Top 0.381: JP1.10 14,93 16.4,93 JP1.8 16.6,93 19,93 JP1.6 19.1,93 21.5,93 JP1.4 21.7,92.9 22.2,92.9 26.1,89 v31.4,89 | C3.2 49,87 | U2.22 24.8,71 23.6,71 22.1,69.5 17.5,69.5 14.9,72.1 S1.B2 | 8.3,4.4 LOGIC_HEADER.1 7,4.3
  Top 0.4: ANDS.P$4 74.97,58.48 75,58
  Top 0.406: 67.05,62.95 CAP_COMP.2 | 45,74 45,72.5 46,71.5 | 40.5,74.3 44,74.3 44.5,74 | 26.8,71.05 24.97,71.05 U2.22 | U2.63 35.51,74.31 32.6,71.4 v32.35,71.65 37.69,66.31 U2.53 41.71,66.31 41.8,66.4 41.8,67.3 41.9,67.4
  Top 0.61: 67.55,61.15 67.56,59.86 | v29.35,68.4 29.35,68.5 26.8,71.05 | C22.2 C17.2 41.9,67.4 | CAP_SENSE_BUF.2 99.65,53 CLAMP2.A 101.85,50.5 94.5,50.5 91.9,53.1 C5.2 | 82.4,61.9 82.4,58.11 82.3,58 | OPTO_KICK.4 84.91,58.91 84,58 | 16.95,30.4 17,30 | 17,30 15.1,30 C14.2 | C9.2 17.1,29.9 17,30 | 5.0REG.2 20.5,23 21,23.5 21,25.5
  Top 0.813: RBG.1 C19.2 | 37.87,21.46 37.87,20.02 37.85,20 39.45,20 RBG.1 | 39.45,19.8 RBG.1 | C8.2 21,26 | R16.1 48.6,58.3 v48,58
  Top 1.422: 67.56,59.86 67,58 | C6.2 64,58 | C15.2 57,58 | 39.45,19.8 39.45,19.45 39,19 34.55,19 32.55,17 | C10.2 12.5,6.01 12.75,5.76 | C13.2 15.25,6.01 15.5,5.76 | C7.2 17.75,5.76 | 3.3REG.DRAIN 23.55,7.8 23,7.25 23,6.51 23.75,5.76 | C23.2 51.6,36.6 51,36 51.6,35.4 C21.2 | 55,97.8 51,97.8
  Top 1.67: BB_CON.3 51,94.5 49,92.5 49,90.5 | 49,90.5 49,87 | v48,90 48.5,90 49,90.5
  Top 1.676: v48,58 57,58 64,58 67,58 75,58 79,58 | 79,58 78.9,58.02 | 78.9,58.02 82.3,58 83,58 84,58 89,53 91.7,53 C5.2 | 79,58 78.83,57.94 78.9,58.02 | 21,25.5 21,26 | 17.16,30.4 16.95,30.4 | BB_CON.5 55,97.8 | 51,97.8 BB_CON.3
  Top 1.778: 8,4.2 8.3,4.4 8.6,4.6
  Top 1.93: LOGIC_HEADER.3 LOGIC_HEADER.4
  Top 2.54: LED5.C LED6.C LED7.C 3.5,30 3.9,30.4 C11.2 16.95,30.4 | 3.5,27.6 3.5,27.2 3.3,27 | 32.55,36 32.55,42.8 47.4,57.6 v48,58 | 32.55,36 32.55,17.92 | 33.22,17.24 32.55,17.92 | 32.55,17.92 32.55,17 32.55,15 | 32.55,15 32.55,13.05 | RSENSE.1 32.85,14.7 32.55,15 | C20.2 51,36 32.55,36 | LOGIC_HEADER.2 LOGIC_HEADER.3 8,6.5 8.75,5.75 8.75,4.75 LOGIC_HEADER.1 | 21,26 21,28.5 19.1,30.4 17.16,30.4
  Top 3.81: 3.3,27 3.3,7.7 6.2,4.8 7,4.3 7.8,3.8 8,3.6 | 3.5,27.6 3.5,30 LED4.C LED3.C LED2.C
  Top 6.452: TMP.2 32.5,5.76 | 32.5,5.76 23.75,5.76 17.75,5.76 15.5,5.76 12.75,5.76 8.78,5.76 LOGIC_HEADER.2 | 32.55,13.05 32.55,5.81 32.5,5.76
  Bottom 0.381: v31.4,89 32.15,88.65
  Bottom 1.67: 32.15,81.5 32.15,88.65 32.5,89 47,89 v48,90
  Bottom 2.54: v48,58 40.85,63.15 v32.35,71.65 32.2,71.8 | 32.2,71.8 32.2,81.45 32.15,81.5 | 32.2,71.8 32.2,71.25 v29.35,68.4
  pour Top: 6,99 1,94 1,6 6,1 56,1 56,38 71,53 82,53 88,59 88,67 83,72 64,72 55,81 55,98 54,99
HYSTERESIS
  Top 0.406: R8.1 CAP_COMP.1 66.25,65.55 R7.2
KICK_ENABLE  (via drill 0.61)
  Top 0.381: v41.4,60.3 40.3,61.4 38.6,61.4 U2.48 | v64.8,65.1 64.8,66 65.5,66.7 68.5,66.7 69.5,65.7 v69.5,65.2 | v73.5,62.2 73.5,61.8 73.7,61.6 73.7,60.6 ANDS.P$2
  Bottom 0.381: v41.4,60.3 41.9,60.3 47.2,55 52.7,55 62.8,65.1 v64.8,65.1 | v69.5,65.2 72.5,62.2 v73.5,62.2
MISO
  Top 0.381: 13.7,75.5 22.2,75.5 22.5,75.8 25.9,75.8 26.2,75.5 28.5,75.5 28.9,75.9 28.9,76.7 U2.13 | 13.7,75.5 R3.1 | 13.7,75.5 13.7,91.3 12.5,92.5 12.5,93.5 13.9,94.9 13.9,95.5 JP1.9
MOSI  (via drill 0.61)
  Top 0.381: R2.1 13.6,73 14,73.4 15.9,73.4 v18.7,70.6 | v29,78.2 29.7,77.5 29.7,76.8 U2.12
  Bottom 0.381: 18.7,78.2 18.7,85.7 25.5,92.5 25.5,94.1 JP1.1 | 18.7,78.2 v18.7,70.6 | 18.7,78.2 v29,78.2
N$1
  Top 0.254: 61.5,63 R12.1 | CAP_COMP.3 66.3,62 66.15,61.9
  Top 0.61: 61.5,63 62.6,61.9 C6.1 66.15,61.9 | PWM_FILT.P$1 61.4,62.2 R12.1
N$2
  Top 0.381: LED2.A R17.1
N$3
  Top 0.254: R3.2 9.1,75.5 SPI_HEADER.2
N$4
  Top 0.254: R4.2 8,78 SPI_HEADER.3
N$5
  Top 1.422: SWITCH_Q.DRAIN 46.75,25 R31.2 RVOUT.2
  Top 3.81: SWITCH_Q.DRAIN 57,25 62,20 62,16 | 62,16 U$1.P$6 | U$1.P$7 62.67,15.33 62,16
N$6
  Top 0.305: 42.15,25.16 CHARGE_U.P$10 41.98,25.3 40.05,25.3
  Top 1.422: RBG.2 39.65,21.8 40.05,21.8 | 40.05,25.3 40.05,21.8 | 40.05,21.8 40.15,21.7 C19.1
N$7
  Top 0.305: CHARGE_U.P$9 43.59,24.64 RVOUT.1
N$9
  Top 0.305: CHARGE_U.P$7 43.35,23.64 43.7,23.3
  Top 0.406: 43.7,23.3 43.7,22.9 44.5,22.1 46.85,22.1 SWITCH_Q.GATE
N$10
  Top 0.305: CHARGE_U.P$8 44.3,24.14 R31.1
N$12
  Top 0.254: SPI_HEADER.1 R2.2
N$13
  Top 3.81: R1.P$2 82.5,46.35 88.55,40.3 88.55,36.5 DISCHARGE_D.C
N$16
  Top 0.61: 5.0REG.4 17.2,25.6 C8.1
N$17
  Top 3.81: DISCHARGE_Q.DRAIN R1.P$1
N$20
  Top 0.406: OPTO_KICK.3 83.64,63.37 83,64 R25.1
N$21
  Top 0.381: LED3.A R18.1
N$22
  Top 0.381: LED4.A R19.1
N$24
  Top 0.305: CHARGE_U.P$6 42.13,22.86
  Top 0.406: 42.13,22.86 45,20
  Top 2.54: SWITCH_Q.SOURCE 54,18.95 54,16 52.7,14.7 RSENSE.2 45,15.6 45,20
N$25
  Top 0.381: LED5.A R20.1
N$26
  Top 0.381: LED6.A R21.1
N$31
  Top 0.381: LED7.A R22.1
N$32
  Top 0.8: 51,91.5 R5.2
  Top 1.676: BB_CON.4 53,93.5 51,91.5
N$33
  Top 1.676: KICK.2 85,91
  Top 2.54: 85,91 KICK_Q.DRAIN
  Bottom 1.676: KICK_FLYBACK.ANODE 86.89,89.11 KICK.2
N$34
  Top 1.676: CHIP.2 74,93
  Top 2.54: 74,93 CHIP_Q.DRAIN
  Bottom 1.016: 73.75,93.25 CHIP.2
  Bottom 1.93: CHIP_FLYBACK.ANODE 75,92 73.75,93.25
N$36
  Top 0.406: OPTO_KICK.1 78.97,61.93 R26.1
N$40
  Top 1.67: BB_CON.1 46.5,96 45,94.5 R6.2
PWM  (via drill 0.61)
  Top 0.381: v57.8,64 R12.2 | v34.2,78.2 30.3,78.2 29.3,79.2 28.7,79.2 27.4,77.9 27.4,76.8 U2.15
  Bottom 0.381: v34.2,78.2 34.2,74.5 38.3,70.4 46.8,70.4 53.2,64 v57.8,64
RESET  (via drill 0.61)
  Top 0.381: 22.6,72.7 22.1,72.7 21.5,72.1 R9.1 | 22.6,72.7 U2.20 | v25.8,95.7 24.6,96.9 20.3,96.9 19,95.6 JP1.5 | v22.6,72.8 22.6,72.7
  Top 0.406: R9.1 19.43,72.1 S1.A2
  Bottom 0.381: v22.6,72.8 22.6,73.7 22.4,73.9 22.4,74.5 25.1,77.2 29.3,77.2 30,77.9 30,91.5 v25.8,95.7
RLED1
  Top 0.381: R17.2 12.7,67 14.3,65.4 21,65.4 24,62.4 25.9,62.4 26.2,62.7 28.5,62.7 28.9,62.3 28.9,61.5 U2.36
RLED2
  Top 0.381: R19.2 24.5,61 25.8,59.7 29.6,59.7 30.5,60.6 30.5,61.4 U2.38
RLED3
  Top 0.381: R21.2 13.9,41.9 32.1,60.1 32.1,61.4 U2.40
SCK  (via drill 0.61)
  Top 0.381: R4.1 12.9,91.2 11.9,92.2 11.9,95.4 | 11.9,95.4 13.4,96.9 15.1,96.9 16.4,95.6 JP1.7 | v29.8,75.2 30.5,75.9 30.5,76.7 U2.11 | v22.6,68.7 10.4,68.7 6.6,72.5 6.6,96.4 7.4,97.2 10.1,97.2 11.9,95.4
  Bottom 0.381: v29.8,75.2 29.8,73.4 29.9,73.3 29.9,72.7 25.9,68.7 v22.6,68.7
SS_K  (via drill 0.61)
  Top 0.381: v28.9,73 31.3,75.4 31.3,76.7 U2.10 | v19.7,74.4 12.4,74.4 11.9,74.9 11.9,79.2 8,83.1 SPI_HEADER.5
  Bottom 0.381: v28.9,73 24.1,73 22.9,71.8 22.3,71.8 v19.7,74.4
TO_DRIB
  Top 1.676: DRIB.2 64,88 63,87 DRIB_TRAN.DRAIN
TO_NEON
  Top 0.254: 109,7.5 NEON.1
  Top 0.381: R24.1 109.4,7.3 NEON.1
TRANS_OUT
  Top 2.54: CHARGE_D.A 77.1,35.9 U$1.P$1
UNBUF_DIVCAP
  Top 0.406: R15.2 R14.1 | CLAMP2.C 101.62,55.12 | 98.85,57.9 CLAMP1.A | CAP_SENSE_BUF.3 99.38,55.12
  Top 0.8: 101.62,55.12 98.85,57.9
  Top 0.813: 99.38,55.12 101.62,55.12 | CLAMP2.C 102.4,54.75 R15.2
~DIS  (via drill 0.61)
  Top 0.381: v99,28.1 99.1,28.2 102.6,28.2 110,20.8 110,17.3 109.8,17.1 108.4,17.1 108,16.7 108,11 DIS_SIG_Q.1 | v37.2,63.1 37.6,63.1 38.3,63.8 40.1,63.8 U2.50
  Bottom 0.381: v99,28.1 97.1,28.1 93.6,24.6 75.7,24.6 v37.2,63.1

## Text on the board
tPlace: KICK | RESET | Buff | 5V | 12V | 3.3V | GND | GND | 12V | GND | SAFETY